# Altium PCB FUFO.PcbDoc
Units mil, origin at the board's own origin, x right, y up, seen from the top; angles counter-clockwise.
Board outline 3450 x 3450 mil, 2 copper layers (Top Layer, Bottom Layer); 36 components, 42 nets, 191 pads, 8 vias.
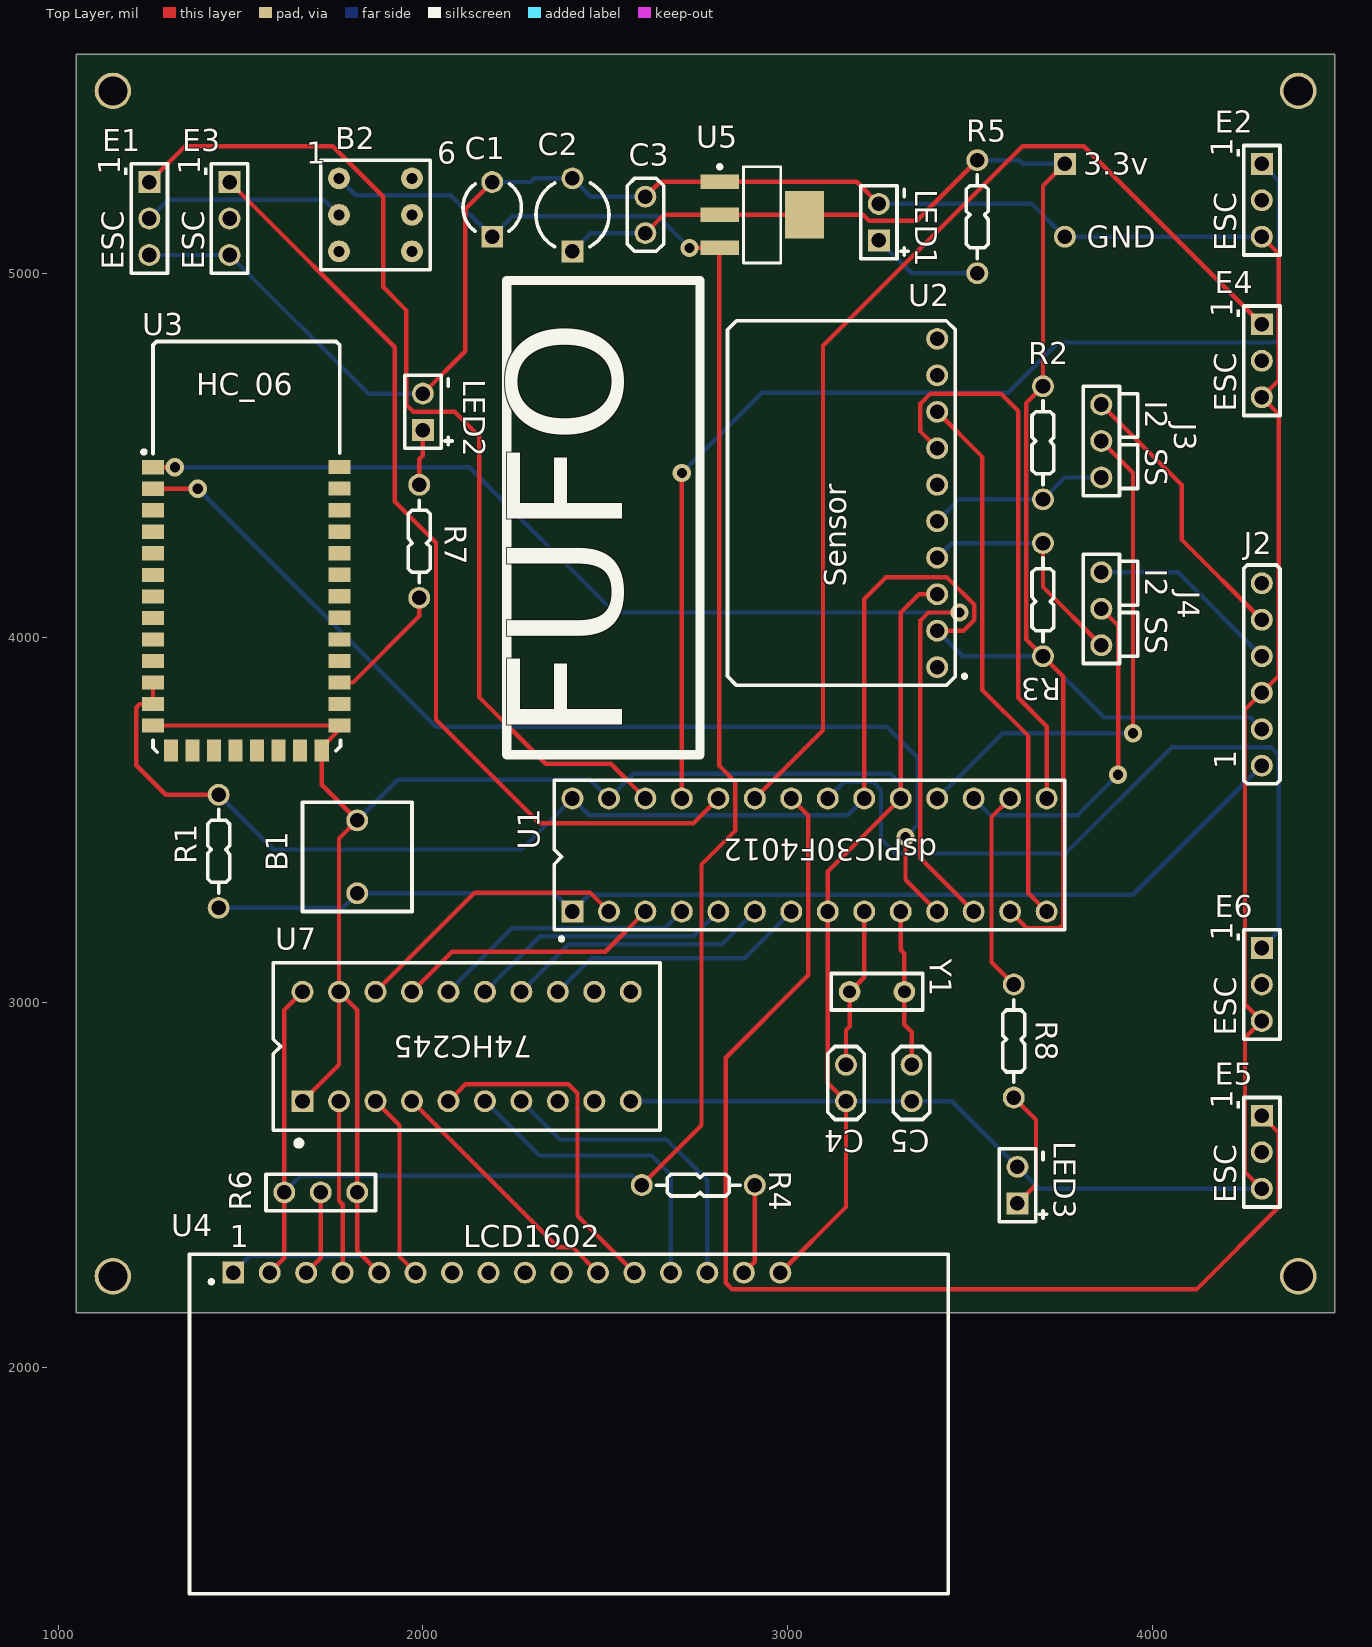
[diagram p0: Top Layer view]
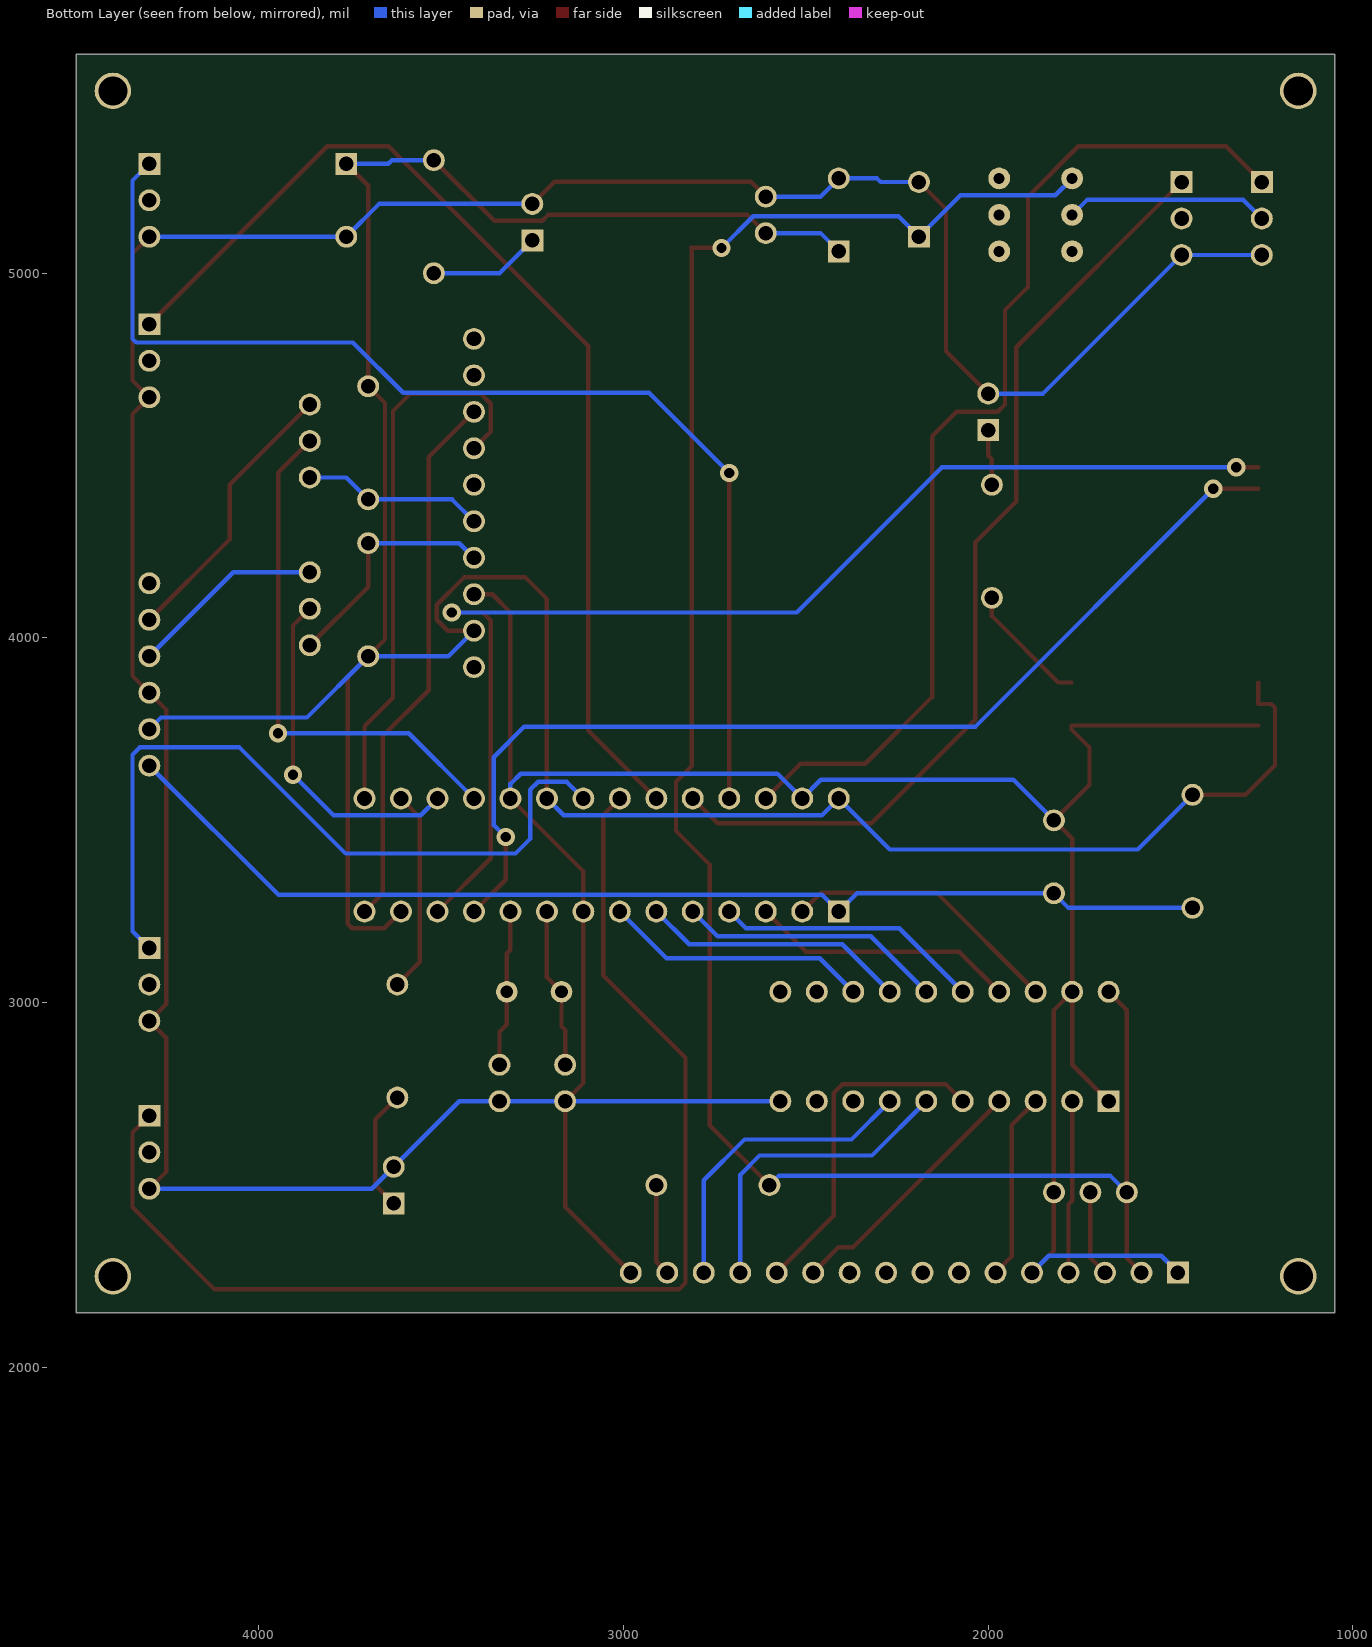
[diagram p1: Bottom Layer view, seen from below]

## Layer stack, top to bottom
Top Layer: signal copper 1.4
Dielectric: dielectric 12.6, FR-4, Dk 4.8
Bottom Layer: signal copper 1.4

## Board outline
1050,2150 4500,2150 4500,5600 1050,5600

## Design rules (kind name [scope] priority, off if disabled: settings)
Clearance [All] p1: gap=10
HoleSize [All] p1: absolutevalues=TRUE maxlimit=200 minlimit=1 maxpercent=80.000 minpercent=20.000
MinimumSolderMaskSliver [All] p1: minsoldermaskwidth=7
PolygonConnect [All] p1: connectstyle=Relief reliefconductorwidth=10 reliefentries=4 polygonreliefangle="90 Angle"
RoutingVias [All] p1: holewidth=28 width=50 viastyle="Through Hole" minholewidth=10 minwidth=10 maxholewidth=200 maxwidth=200
SilkToSilkClearance [All] p1: silktosilkclearance=4
SilkscreenOverComponentPads [All] p1: minsilkscreentomaskgap=4
SolderMaskExpansion [All] p1: expansion=5
Width [All] p1: maxlimit=100 minlimit=5 preferedwidth=12
24 further rules are at their usual default settings.

## Components (designator, comment, footprint, x,y, rotation, side; value= is the part's Value field where it differs from the comment)
3.3v "3.3v" 3.3v 3760,5300 r90 top
B1 "Button1" Button1 1820,3400 r180 top
B2 "Button2" Button2 1870,5160 r0 top
C1 "10uF" Capacitor2 2190,5180 r180 top
C2 "22uF" Capacitor3 2410,5160 r180 top
C3 "104pF" Capacitor1 2610,5160 r0 top
C4 "33uF" Capacitor1 3160,2780 r180 top
C5 "33uF" Capacitor1 3340,2780 r180 top
E1 "ESC" ESC 1350,5150 r0 top
E2 "ESC" ESC 4400,5200 r0 top
E3 "ESC" ESC 1570,5150 r0 top
E4 "ESC" ESC 4400,4760 r0 top
E5 "ESC" ESC 4400,2590 r0 top
E6 "ESC" ESC 4400,3050 r0 top
GND "GND" GND 3760,5100 r90 top
J2 "JAC_ICD2" JAC_ICD2 4300,3900 r180 top
J3 "JAC_CV" JAC_CV 3860,4540 r180 top
J4 "JAC_CV" JAC_CV 3860,4080 r180 top
LED1 "Led" LED 3200,5140 r180 top
LED2 "Led" LED 1950,4620 r180 top
LED3 "Led" LED 3580,2500 r180 top
R1 "4.7k" Resistor 1440,3420 r180 top
R2 "4.7k" Resistor 3700,4540 r180 top
R3 "4.7k" Resistor 3700,4100 r0 top
R4 "560" Resistor 2760,2500 r90 top
R5 "560" Resistor 3520,5160 r180 top
R6 "10k" BienTro 1720,2480 r270 top
R7 "560" Resistor 1990,4260 r0 top
R8 "560" Resistor 3620,2900 r180 top
U1 "dsPIC30F4012" dsPIC30F4012 3060,3400 r90 top
U2 "Sensor" Sensor 3160,4320 r180 top
U3 "Module_Bluetooth" Module_Bluetooth 1260,3760 r0 top
U4 "LCD1602" LCD1602 2180,2760 r90 top
U5 "L1117-3.3" "L1117 - 3.3" 2930,5160 r0 top
U7 "74HC245" 74HC245 2120,2880 r90 top
Y1 "7.3728MHz" XTAL 3320,3030 r180 top

## Footprints (in the part's own frame and the unit in brackets; to place one, negate y for a bottom-side part, rotate by r counter-clockwise, add the part's x,y. Pads: shape width x height; smd on the part's side, far side on the other; paste and mask are expansions set on the pad)
3.3v [mil]
  rect 60x60 hole 40: 0(0,0)
74HC245 [mil]
  rect 60x60 hole 40: 1(-150,450)
  round 60 hole 40: 2(-150,350) 3(-150,250) 4(-150,150) 5(-150,50) 6(-150,-50) 7(-150,-150) 8(-150,-250) 9(-150,-350) 10(-150,-450) 11(150,-450) 12(150,-350) 13(150,-250) 14(150,-150) 15(150,-50) 16(150,50) 17(150,150) 18(150,250) 19(150,350) 20(150,450)
  silkscreen extent -270,-530 230,530
BienTro [mil]
  round 60 hole 40: 0(0,100) 1(0,0) 2(0,-100)
  silkscreen extent -50,-150 50,150
Button1 [mil]
  round 60 hole 40: 1(0,-100) 2(0,100)
  silkscreen extent -150,-150 150,150
Button2 [mil]
  round 60 hole 30: 1(-100,100) 2(-100,0) 3(-100,-100) 4(100,-100) 5(100,0) 6(100,100)
  silkscreen extent -150,-150 150,150
Capacitor1 [mil]
  round 60 hole 40: 1(0,50) 2(0,-50)
  silkscreen extent -50,-100 50,100
Capacitor2 [mil]
  rect 60x60 hole 40: 1(0,80)
  round 60 hole 40: 2(0,-70)
  silkscreen extent -80,-66 80,65
Capacitor3 [mil]
  rect 60x60 hole 40: 1(0,100)
  round 60 hole 40: 2(0,-100)
  silkscreen extent -100,-88 100,87
dsPIC30F4012 [mil]
  rect 60x60 hole 40: 1(-150,650)
  round 60 hole 40: 2(-150,550) 3(-150,450) 4(-150,350) 5(-150,250) 6(-150,150) 7(-150,50) 8(-150,-50) 9(-150,-150) 10(-150,-250) 11(-150,-350) 12(-150,-450) 13(-150,-550) 14(-150,-650) 15(160,-650) 16(160,-550) 17(160,-450) 18(160,-350) 19(160,-250) 20(160,-150) 21(160,-50) 22(160,50) 23(160,150) 24(160,250) 25(160,350) 26(160,450) 27(160,550) 28(160,650)
  silkscreen extent -230,-700 210,700
ESC [mil]
  rect 60x60 hole 40: 1(-100,100)
  round 60 hole 40: 2(-100,0) 3(-100,-100)
  silkscreen extent -170,-150 -50,150
GND [mil]
  round 60 hole 40: 0(0,0)
JAC_CV [mil]
  round 60 hole 40: 1(0,100) 2(0,0) 3(0,-100)
  silkscreen extent -100,-150 50,150
JAC_ICD2 [mil]
  round 60 hole 40: 1(0,250) 2(0,150) 3(0,50) 4(0,-50) 5(0,-150) 6(0,-250)
  silkscreen extent -50,-300 50,300
"L1117 - 3.3" [mm] "SOT223, 4-Leads, Body 6.5x3.5mm, Pitch 2.3mm, Lead Span 7mm, IPC Low Density"
  rect 2.7x1 smd: 1(-2.95,2.3) 2(-2.95,0) 3(-2.95,-2.3)
  rect 2.7x3.3 smd: 4(2.95,0)
  silkscreen extent -3.07,-3.35 1.3,3.47, body extent -1.85,-3.35 1.85,3.35, height 1.7
LCD1602 [mil]
  rect 60x60 hole 40: 1(-500,700)
  round 60 hole 40: 2(-500,600) 3(-500,500) 4(-500,400) 5(-500,300) 6(-500,200) 7(-500,100) 8(-500,0) 9(-500,-100) 10(-500,-200) 11(-500,-300) 12(-500,-400) 13(-500,-500) 14(-500,-600) 15(-500,-700) 16(-500,-800)
  silkscreen extent -1380,-1260 -450,820
LED [mil]
  rect 60x60 hole 40: 1(-50,50)
  round 60 hole 40: 2(-50,-50)
  silkscreen extent -130,-100 0,100
Module_Bluetooth [mil]
  rect 60x39 smd: 1(0,708) 2(0,649) 3(0,590) 4(0,531) 5(0,472) 6(0,413) 7(0,354) 8(0,295) 9(0,236) 10(0,177) 11(0,118) 12(0,59) 13(0,0) 22(511.68,0) 23(511.68,59.04) 24(511.68,118.08) 25(511.68,177.12) 26(511.68,236.16) 27(511.68,295.2) 28(511.68,354.24) 29(511.68,413.28) 30(511.68,472.32) 31(511.68,531.36) 32(511.68,590.4) 33(511.68,649.44) 34(511.68,708.48)
  rect 39x60 smd: 14(49.2,-68.88) 15(108.24,-68.88) 16(167.28,-68.88) 17(226.32,-68.88) 18(285.36,-68.88) 19(344.4,-68.88) 20(403.44,-68.88) 21(462.48,-68.88)
  silkscreen extent -30,-73 514,1053
Resistor [mil]
  round 60 hole 40: 1(0,160) 2(0,-150)
  silkscreen extent -30,-110 30,120
Sensor [mil]
  round 60 hole 40: 1(-250,400) 2(-250,300) 3(-250,200) 4(-250,100) 5(-250,0) 6(-250,-100) 7(-250,-200) 8(-250,-300) 9(-250,-400) 10(-250,-500)
  silkscreen extent -330,-550 325,450
XTAL [mm] "Connector; Header; 2 Position"
  round 1.5 hole 0.9: 1(0,0) 2(3.81,0)
  silkscreen extent -1.27,-1.27 5.08,1.27

## Part data
C1: library part Capacitor2, "Capacitor2"
C2: library part Capacitor3, "Capacitor3"
C3 C4 C5: library part Capacitor1, "Capacitor1"
R1 R2 R3 R4 R5 R7 R8: library part Resistor
R6: library part BienTro
Y1: library part XTAL

## Free pads (board coordinates)
  round 100 hole 80: 0(1150,2250) 1(4400,2250) 2(4400,5500) 3(1150,5500)

## Via types
v1: diameter 50, hole 28, Top Layer to Bottom Layer, 8 vias

## Nets (pads, with @x,y where several pads share a name; then routed paths per layer and width w, separated by ;. In a path a pad name is that pad's centre, name@x,y a point inside that pad or via, vN(x,y) a via of type N, cw(c..) or ccw(c..) an arc to the next point about the centre after c; other vN are vias at no path point)
3.3V: 3.3v.0 C2.1 C3.2 J2.2 R1.2 R2.2 R3.2 R5.2 U1.13 U1.20 U1.28 U2.2 U3.11 U3.12 U5.2 U5.4 | length 8327.8
  Top Layer w12: U3.11 U3.12 1224,3819 1214,3809 1214,3651 1295,3570 R1.2 ; C3.2 2660,5160 U5.2 U5.4 3207,5160 3223,5144 3354,5144 R5.2 ; U1.20 3210,4107 3269,4166 3437,4166 3512,4091 3512,4050 3482,4020 U2.2 ; U1.13 3656,3204 3744,3204 3756,3216 3756,3894 R3.2 3654,3996 3654,4644 R2.2 3700,5240 3.3v.0
  Bottom Layer w12: R1.2 1590,3420 2270,3420 U1.28 2456,3514 3164,3514 U1.20 ; C2.1 2460,5110 C3.2 ; U2.2 3480,3950 R3.2 3868,3782 4268,3782 J2.2 ; R5.2 3635,5310 3645,5300 3.3v.0
GND: B1.1 C1.2 C2.2 C3.1 C4.1 C5.1 E1.3 E2.3 E3.3 E4.3 E5.3 E6.3 GND.0 J2.3 LED1.2 LED2.2 LED3.2 R6.0 U1.8 U1.19 U1.27 U2.3 U3.13 U3.21 U3.22 U4.1 U4.5 U4.16 U5.1 U7.1 U7.10 U7.19 | length 15035.9
  Top Layer w12: U3.13 U3.22 1771.68,3749.2 1722.48,3700 U3.21 1722.48,3597.52 B1.1 1770,3450 U7.19 ; U7.1 1770,2830 U7.19 ; U4.5 1820,2320 R6.0 1820,2980 U7.19 ; LED2.2 2116,4786 2116,5176 C1.2 ; C3.1 2650.55,5250.55 U5.1 3189.45,5250.55 LED1.2 ; U4.16 3160,2440 C4.1 3110,2780 U1.8 3110,3360 U1.19 3310,4070 3360,4120 U2.3 ; E5.3 4254,2536 4254,2904 E6.3 4254,2996 4254,3804 J2.3 4346,3896 4346,4614 E4.3 4346,4706 4346,5054 E2.3
  Bottom Layer w12: E1.3 E3.3 1850,4670 LED2.2 ; U4.1 1526,2306 1834,2306 U4.5 ; B1.1 1931,3611 2459,3611 U1.27 2578,3628 3282,3628 3310,3600 U1.19 ; C1.2 2295,5250 2305,5260 C2.2 2460,5210 C3.1 ; U7.10 C4.1 C5.1 3450,2730 LED3.2 3690,2490 E5.3 ; LED1.2 3670,5190 GND.0 E2.3
I_LCD_DB4: U1.4 U7.16 | length 731.1
  Bottom Layer w12: U7.16 2244,3204 2664,3204 U1.4
I_LCD_DB5: U1.5 U7.15 | length 731.1
  Bottom Layer w12: U7.15 2322,3182 2742,3182 U1.5
I_LCD_DB6: U1.6 U7.14 | length 731.1
  Bottom Layer w12: U7.14 2400,3160 2820,3160 U1.6
I_LCD_DB7: U1.7 U7.13 | length 731.1
  Bottom Layer w12: U7.13 2462,3122 2882,3122 U1.7
I_LCD_E: U1.3 U7.17 | length 731.1
  Top Layer w12: U7.17 2080,3140 2500,3140 U1.3
I_LCD_RS: U1.2 U7.18 | length 774.2
  Top Layer w12: U7.18 2142,3302 2458,3302 U1.2
LED: R7.2 U3.24 | length 343.7
  Top Layer w12: U3.24 1808.08,3878.08 1990,4060 R7.2
MCLR: B1.2 J2.1 R1.1 U1.1 | length 3063
  Bottom Layer w12: R1.1 1780,3260 B1.2 2360,3300 U1.1 2456,3296 3946,3296 J2.1
NetB2_2: B2.2 E1.2 | length 558.1
  Bottom Layer w12: E1.2 1301,5201 1729,5201 B2.2
NetLED1_1: LED1.1 R5.1 | length 307.3
  Bottom Layer w12: LED1.1 3340,5000 R5.1
NetLED2_1: LED2.1 R7.1 | length 154.1
  Top Layer w12: R7.1 1990,4490 2000,4500 LED2.1
NetLED3_1: LED3.1 R8.1 | length 336.4
  Top Layer w12: R8.1 3681,2679 3681,2501 LED3.1
NetR4_2: R4.2 U4.15 | length 252.4
  Top Layer w12: U4.15 2910,2290 R4.2
NetR6_1: R6.1 U4.3 | length 236.6
  Top Layer w12: U4.3 1720,2300 R6.1
O_LCD_DB4: U4.11 U7.4 | length 704.7
  Top Layer w12: U7.4 2370,2330 2410,2330 U4.11
O_LCD_DB5: U4.12 U7.5 | length 939.6
  Top Layer w12: U7.5 2116,2776 2400,2776 2424,2752 2424,2416 U4.12
O_LCD_DB6: U4.13 U7.6 | length 861.7
  Bottom Layer w12: U7.6 2319,2581 2627,2581 2680,2528 U4.13
O_LCD_DB7: U4.14 U7.7 | length 852.9
  Bottom Layer w12: U7.7 2375,2625 2668,2625 2780,2513 U4.14
O_LCD_E: U4.6 U7.3 | length 515.6
  Top Layer w12: U7.3 1936,2664 1936,2304 U4.6
O_LCD_RS: U4.4 U7.2 | length 474.1
  Top Layer w12: U7.2 1770,2457 1780,2447 U4.4
OSC1: C4.2 U1.9 Y1.2 | length 440.7
  Top Layer w12: C4.2 3160,2925 3170,2935 Y1.2 3210,3070 U1.9
OSC2: C5.2 U1.10 Y1.1 | length 432.4
  Top Layer w12: U1.10 3310,3145 3320,3135 Y1.1 3320,2940 3340,2920 C5.2
PGC: J2.5 J3.3 | length 772.3
  Top Layer w12: J3.3 4080,4420 4080,4270 J2.5
PGD: J2.4 J4.3 | length 535.3
  Bottom Layer w12: J4.3 4070,4180 J2.4
PWM1H: E2.1 U1.25 | length 3179.5
  Top Layer w12: U1.25 v1(2710,4452)
  Bottom Layer w12: v1(2710,4452) 2930,4672 3604,4672 3742,4810 4336,4810 4346,4820 4346,5254 E2.1
PWM1L: E1.1 U1.26 | length 2857
  Top Layer w12: E1.1 1348,5348 1753,5348 1891,5210 1891,4962 1954,4899 1954,4640 1974,4620 2087,4620 2154,4553 2154,3838 2337,3655 2515,3655 U1.26
PWM2H: E4.1 U1.23 | length 2950.2
  Top Layer w12: U1.23 3097,3747 3097,4801 3644,5348 3812,5348 E4.1
PWM2L: E3.1 U1.24 | length 2628.2
  Top Layer w12: E3.1 1923,4797 1923,4374 2036,4261 2036,3776 2320,3492 2742,3492 U1.24
PWM3H: E6.1 U1.21 | length 2093.6
  Bottom Layer w12: U1.21 3156,3606 3234,3606 3256,3584 3256,3449 3296,3409 3762,3409 4053,3700 4326,3700 4346,3680 4346,3196 E6.1
PWM3L: E5.1 U1.22 | length 3327.4
  Top Layer w12: U1.22 3056,3514 3056,3075 2830,2849 2830,2232 2848,2214 4121,2214 4346,2439 4346,2644 E5.1
RD0: U1.15 U2.7 | length 1534.8
  Top Layer w12: U2.7 3364,4566 3364,4642 3392,4670 3584,4670 3632,4622 3632,3836 3710,3758 U1.15
RD1: U1.14 U2.8 | length 1494.3
  Top Layer w12: U2.8 3534,4496 3534,3857 3660,3731 3660,3300 U1.14
RE8: R8.2 U1.16 | length 556.4
  Top Layer w12: U1.16 3559,3509 3559,3111 R8.2
RX: U1.12 U3.1 | length 3350.4
  Top Layer w12: U3.1 v1(1320,4468) ; v1(3471,4070) 3386,4070 3364,4048 3364,3396 U1.12
  Bottom Layer w12: v1(1320,4468) 2127,4468 2525,4070 v1(3471,4070)
SCL: J4.1 R3.1 U2.4 | length 652.8
  Top Layer w12: R3.1 3700,4140 J4.1
  Bottom Layer w12: U2.4 3450,4260 R3.1
SCL_PGD: J4.2 U1.17 | length 935.1
  Top Layer w12: J4.2 3906,4034 v1(3906,3625)
  Bottom Layer w12: U1.17 3556,3514 3795,3514 v1(3906,3625)
SDA: J3.1 R2.1 U2.5 | length 499.7
  Bottom Layer w12: U2.5 3470,4380 R2.1 3760,4440 J3.1
SDA_PGC: J3.2 U1.18 | length 1448.2
  Top Layer w12: J3.2 3947,4453 v1(3947,3739)
  Bottom Layer w12: U1.18 3589,3739 v1(3947,3739)
TX: U1.11 U3.2 | length 2873.6
  Top Layer w12: U3.2 v1(1383,4409) ; v1(3323,3454) 3323,3337 U1.11
  Bottom Layer w12: v1(1383,4409) 2035,3757 3272,3757 3356,3673 3356,3487 v1(3323,3454)
VCC: B2.1 C1.1 R4.1 R6.2 U4.2 U5.3 U7.20 | length 5680.4
  Top Layer w12: U4.2 1620,2300 R6.2 1620,2980 U7.20 ; R4.1 2764,2664 2764,3379 2856,3471 2856,3606 2813,3649 U5.3@2813,5069.45 ; v1(2731,5069.45) U5.3@2813,5069.45 ; U5.3@2813,5069.45 U5.3 U5.3@2813,5069.45
  Bottom Layer w12: R6.2 1666,2526 2574,2526 R4.1 ; B2.1 1816,5214 2076,5214 C1.1 2246,5156 2644.45,5156 v1(2731,5069.45)
pads on no net: B2.3 B2.4 B2.5 B2.6 E2.2 E3.2 E4.2 E5.2 E6.2 J2.6 U2.1 U2.6 U2.9 U2.10 U3.3 U3.4 U3.5 U3.6 U3.7 U3.8 U3.9 U3.10 U3.14 U3.15 U3.16 U3.17 U3.18 U3.19 U3.20 U3.23 U3.25 U3.26 U3.27 U3.28 U3.29 U3.30 U3.31 U3.32 U3.33 U3.34 U4.7 U4.8 U4.9 U4.10 U7.8 U7.9 U7.11 U7.12

## Silkscreen, mask and mechanical layers (free items; w line width, h text height)
Top Overlay:
  lines w25: 2230,3680 2230,4980 2760,4980 2760,3680 2230,3680
  text "1" at 4220,5320 h60 r90
  text "1" at 1170,5270 h60 r90
  text "1" at 1390,5270 h60 r90
  text "1" at 4220,4880 h60 r90
  text "FUFO" at 2650,3720 h540 r90
  text "1" at 4220,3170 h60 r90
  text "1" at 4220,2710 h60 r90
  text "1" at 1470,2330 h60
Mechanical 1:
  lines w10: 1050,2150 1050,5000 1050,5600 3190,5600 4500,5600 4500,2150 1050,2150

## Text inside footprints (layer, text, board x,y; h text height)
B2: Top Overlay "6" at 2040,5300 h60; Top Overlay "1" at 1680,5300 h60
J2: Top Overlay "1" at 4230,3640 h60 r90
J3: Top Overlay "SS" at 3980,4520 h60 r270; Top Overlay "I2" at 3980,4650 h60 r270
J4: Top Overlay "SS" at 3980,4060 h60 r270; Top Overlay "I2" at 3980,4190 h60 r270
U3: Top Overlay "HC_06" at 1378.08,4665.28 h60